# EAGLE board LPF pcb (EAGLE 8.3.1)
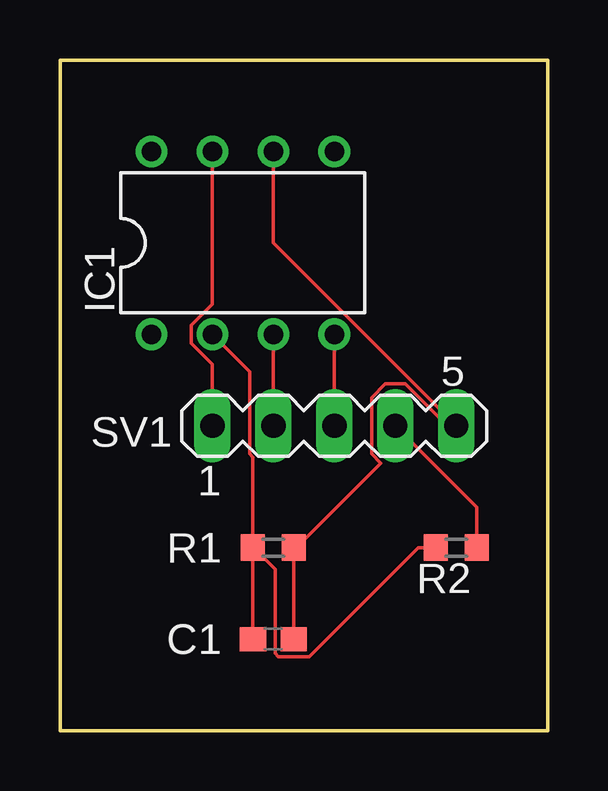
[diagram p0: board, top side]

Size 20.32 x 27.94 mm. Coordinates in mm from the lower left corner, seen from the top.
Outline: 0,26.67 0,0 20.32,0 20.32,27.94 0,27.94 0,26.67
Copper layers (1*16): Top 0.035mm / dielectric 1.5mm / Bottom 0.035mm
Design rules "default": minimum track width 6mil, minimum drill 0.35mm, track to track 6mil, track to pad 6mil, pad to pad 6mil, via to via 6mil, smd to smd 6mil, copper to edge 40mil, drill to drill 6mil, minimum pad ring 10mil, minimum via ring 8mil, stop-mask expansion 4mil, vias tented up to drill 0mil, thermal gap 10mil

## Footprints (pad centres in the part's own frame; a part is rotated, then mirrored left to right if it is on the bottom)
C0603 = smd 1.1 x 1: 1 -0.85,0; 2 0.85,0
DIL08 = drill 0.813 pad 1.27: 1 -3.81,-3.81; 2 -1.27,-3.81; 3 1.27,-3.81; 4 3.81,-3.81; 5 3.81,3.81; 6 1.27,3.81; 7 -1.27,3.81; 8 -3.81,3.81
R0603 = smd 1 x 1.1: 1 -0.85,0; 2 0.85,0
MA05-1 = drill 1.016 long: 1 -5.08,0; 2 -2.54,0; 3 0,0; 4 2.54,0; 5 5.08,0

## Placement (x,y rotation side)
C1  2uF  [C0603]  8.89,3.81 0 top
IC1  LM741P  [DIL08]  7.62,20.32 0 top
R1  10k  [R0603]  8.89,7.62 0 top
R2  1k  [R0603]  16.51,7.62 180 top
SV1  [MA05-1]  11.43,12.7 0 top

## Library data of the parts
C1 R1 R2 = rcl
IC1 = linear
SV1 = con-lstb; OC_FARNELL: unknown; OC_NEWARK: unknown

## Nets
+15V: IC1.7 SV1.1
-15V: IC1.4 SV1.3
GND: IC1.3 SV1.2
N$1: R2.1 SV1.4
N$2: C1.1 IC1.2 R1.1 R2.2
N$3: C1.2 IC1.6 R1.2 SV1.5

## Tracks (layer width: path | path; a pad name or v marks a point on that pad's centre or on a via)
+15V
  Top 0.152: IC1.7 6.35,17.77 5.46,16.88 5.46,16.14 6.35,15.25 SV1.1
-15V
  Top 0.152: IC1.4 SV1.3
GND
  Top 0.152: IC1.3 SV1.2
N$1
  Top 0.152: R2.1 17.36,9.31 SV1.4
N$2
  Top 0.152: 8.04,7.65 8.04,11.39 7.9,11.53 7.9,14.96 IC1.2 | 8.04,7.65 R1.1 C1.1 | R2.2 14.92,7.62 10.38,3.08 9.1,3.08 8.96,3.21 8.96,6.73 8.04,7.65
N$3
  Top 0.152: IC1.6 8.89,20.32 SV1.5 16.13,12.7 14.38,14.45 13.56,14.45 12.98,13.87 12.98,11.53 13.36,11.14 9.74,7.52 | 9.74,7.52 R1.2 | 9.74,7.52 C1.2